# EAGLE board PCB v14 (EAGLE 9.7.0)
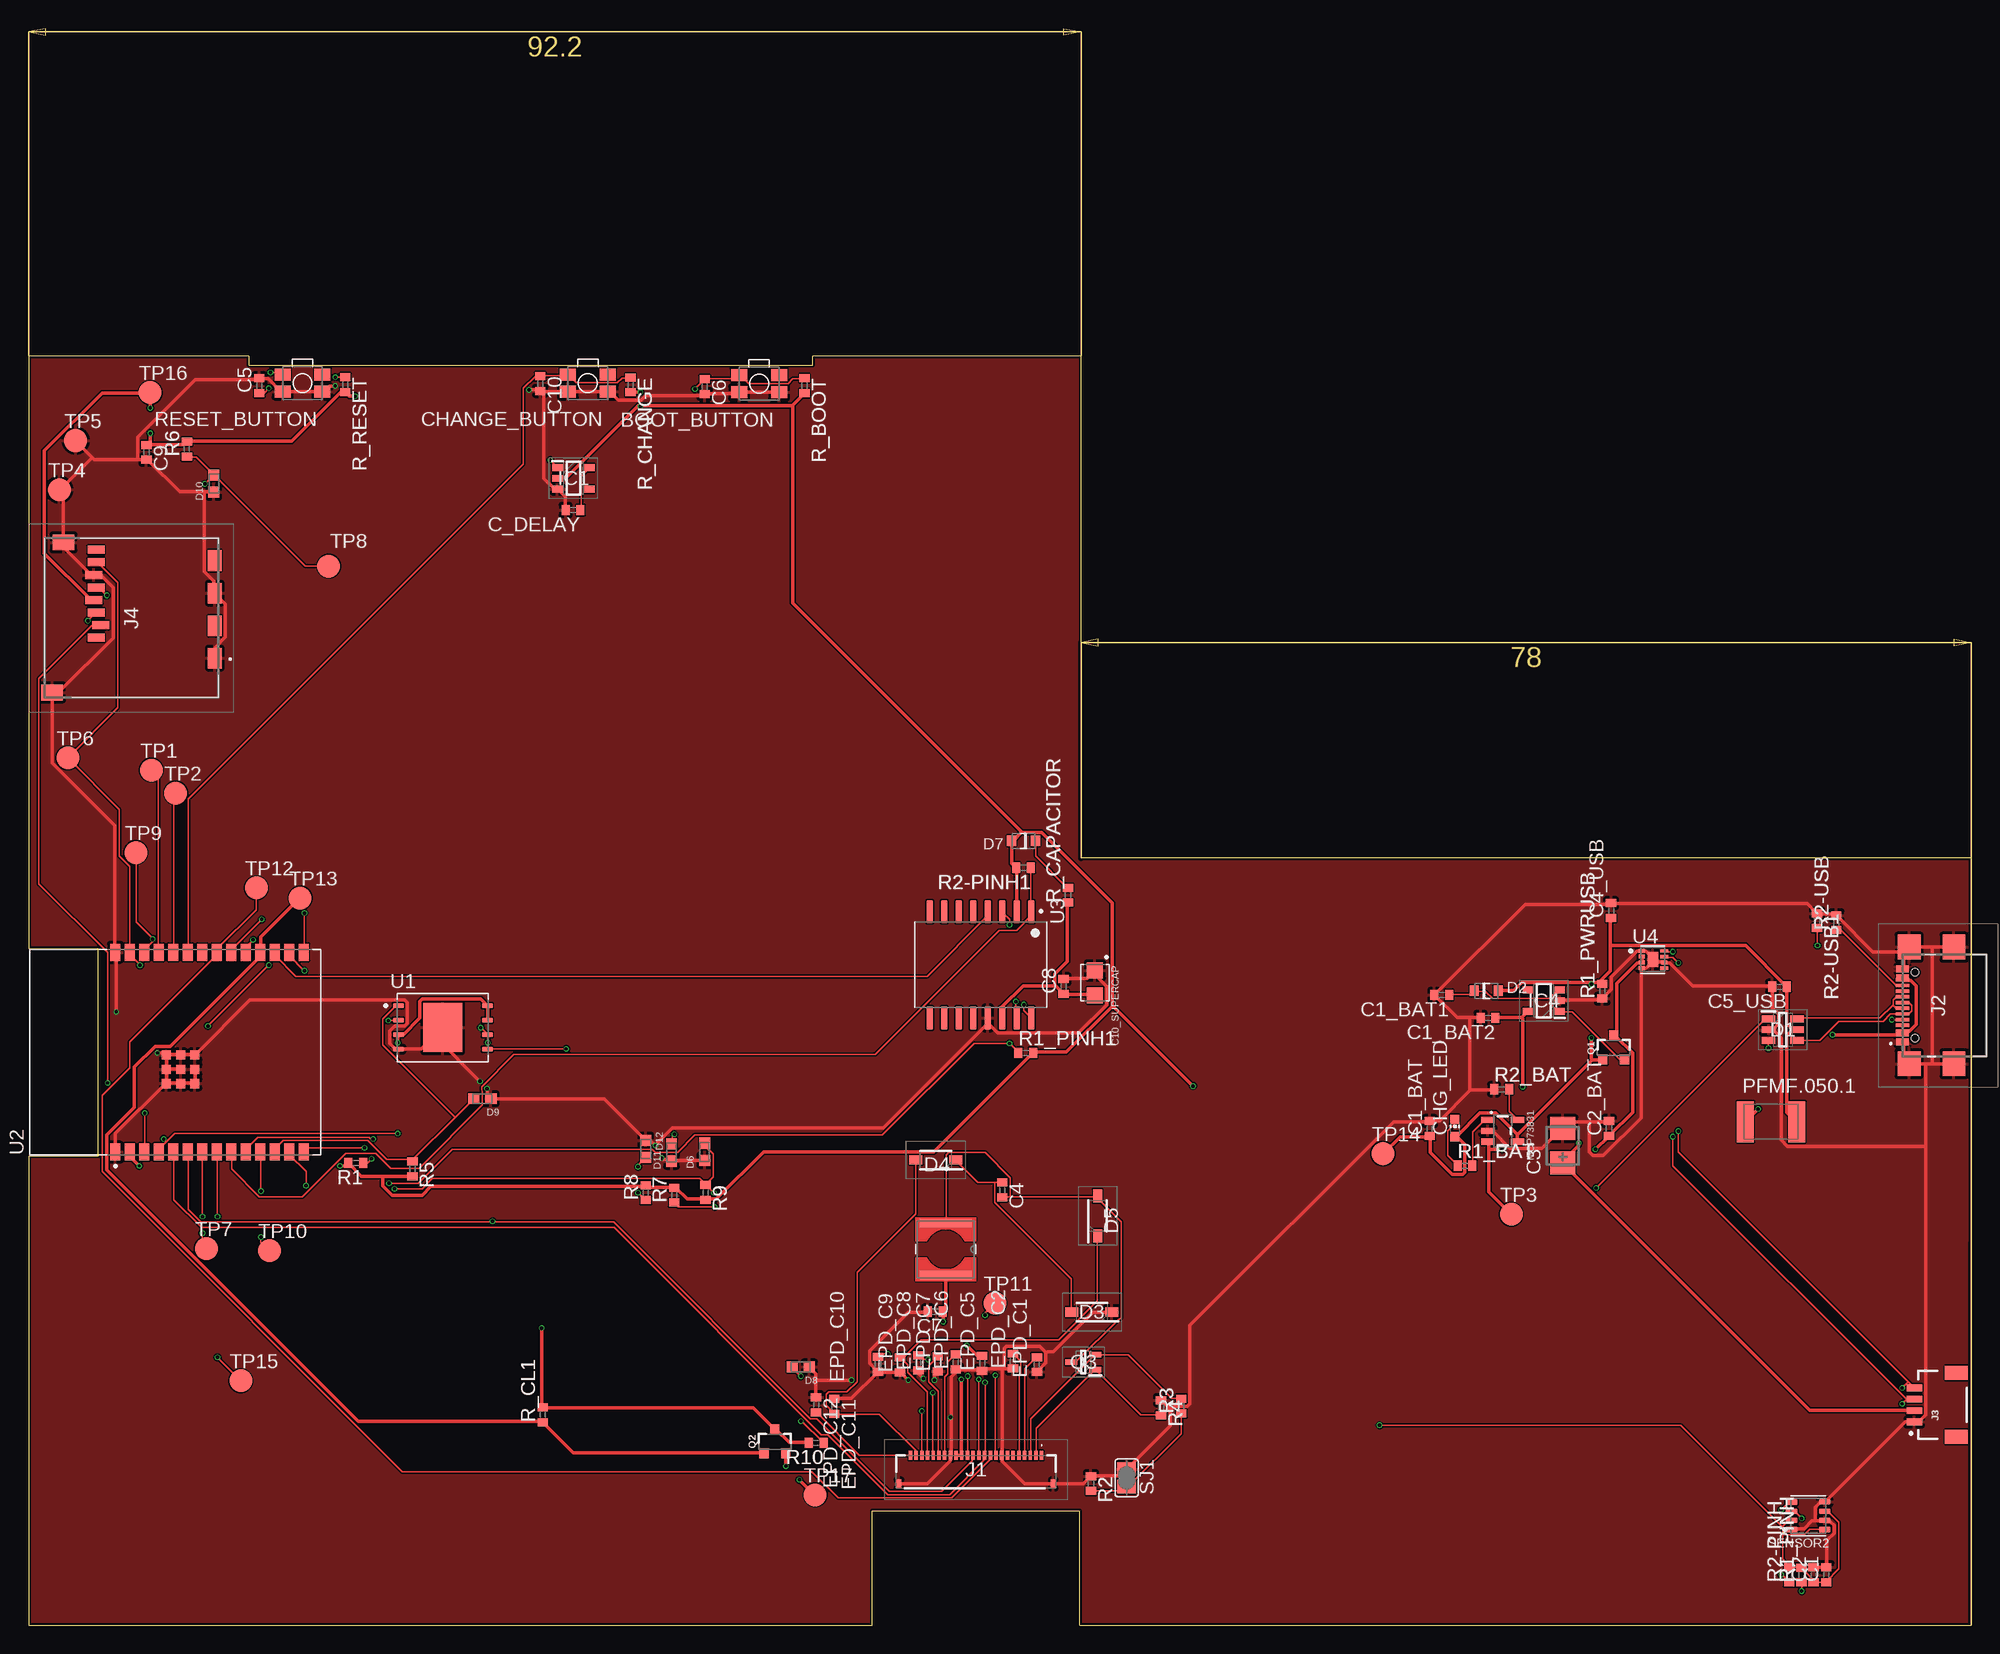
[diagram p0: board, top side]
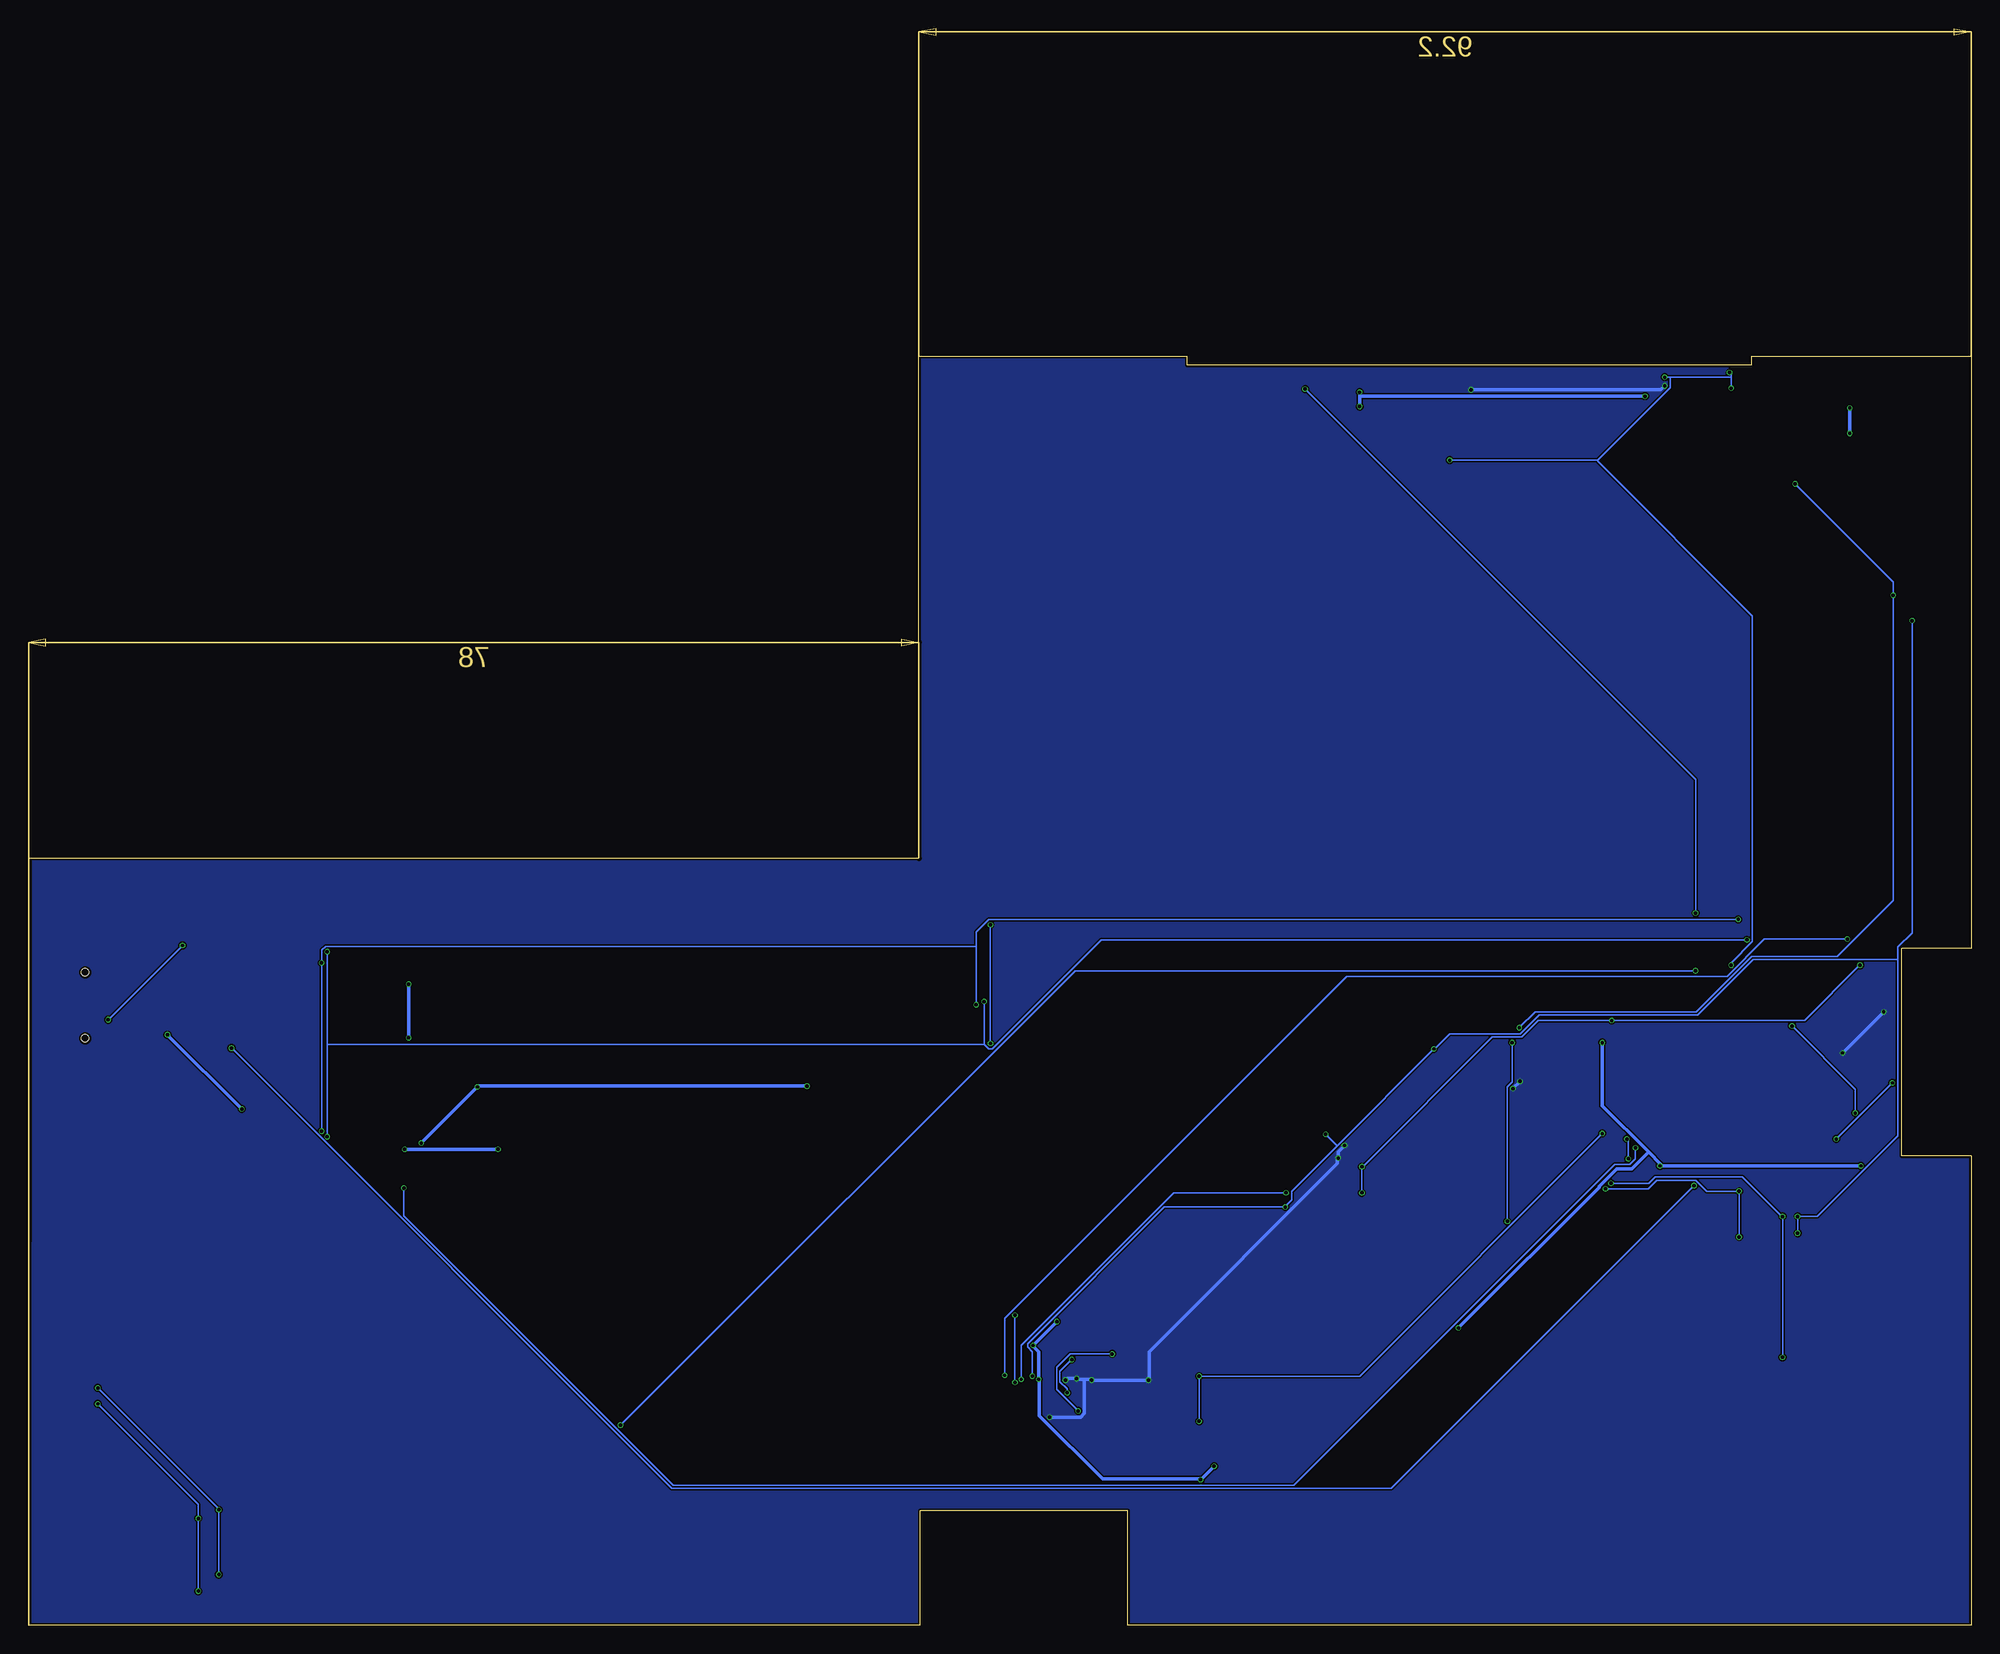
[diagram p1: board, bottom side, seen from below]

Size 170.2 x 111.2 mm. Coordinates in mm from the lower left corner, seen from the top.
Outline: 0,0 73.9,0 73.9,10 92.1,10 92.1,0 170.2,0 170.2,67.2 92.2,67.2 92.2,111.2 68.7,111.2 68.7,110.4 19.3,110.4 19.3,111.2 0,111.2 0,59.3 6.1,59.3 6.1,41.1 0,41.1 0,0
Copper layers (1*16): Top 0.035mm / dielectric 1.6mm / Bottom 0.035mm
Design rules "jlcpcb-2layers.dru": minimum track width 0.15mm, minimum drill 0.3mm, track to track 5mil, track to pad 5mil, pad to pad 5mil, via to via 5mil, smd to smd 5mil, copper to edge 0.2mm, drill to drill 6mil, minimum pad ring 10mil, minimum via ring 3mil, stop-mask expansion 4mil, vias tented up to drill 0mil, thermal gap 10mil
Net classes: 1 POWER: width 0.3 mm

## Footprints (pad centres in the part's own frame; a part is rotated, then mirrored left to right if it is on the bottom)
MYBUTTON = smd 1.4 x 1.05: 1 1.75,0.75; 2 -1.75,0.75; 3 -1.75,-0.75; 4 1.75,-0.75
EAGLE-LTSPICE_C0402 = smd 0.7 x 0.9: 1 -0.65,0; 2 0.65,0
RCL_CT3528 = smd 2 x 2.2: + -1.5,0; - 1.5,0
CAPCP3225X100N = smd 1.4 x 1.4: 1 -1.1,0; 2 1.1,0
ADAFRUIT_CHIP-LED0603 = smd 0.8 x 0.8: A 0,-0.75; C 0,0.75
SOT95P280X145-6N = smd 1.2 x 0.6: 1 -1.25,0.95; 2 -1.25,0; 3 -1.25,-0.95; 4 1.25,-0.95; 5 1.25,0; 6 1.25,0.95
ESP32_WROVER_AVX---SD0805S020S1R0_AVX_SD0805S020S1R0_0 = smd 0.8 x 0.9: 1 -1.05,0; 2 1.05,0
SOD3716X135N = smd 1.15 x 0.8: 1 -1.75,0; 2 1.75,0
DIOC1608X36N = smd 0.97 x 0.94: 1 -0.75,0; 2 0.75,0
SOT95P280X125-5N = smd 0.9 x 0.6: 1 -1.4,0.95; 2 -1.4,0; 3 -1.4,-0.95; 4 1.4,-0.95; 5 1.4,0.95
SOT95P280X120-5N = smd 0.9 x 0.6: 1 -1.4,0.95; 2 -1.4,0; 3 -1.4,-0.95; 4 1.4,-0.95; 5 1.4,0.95
FH34SRJ24S05SH99 = smd 0.3 x 0.8: 1 5.75,1.45; 2 5.25,1.45; 3 4.75,1.45; 4 4.25,1.45; 5 3.75,1.45; 6 3.25,1.45; 7 2.75,1.45; 8 2.25,1.45; 9 1.75,1.45; 10 1.25,1.45; 11 0.75,1.45; 12 0.25,1.45; 13 -0.25,1.45; 14 -0.75,1.45; 15 -1.25,1.45; 16 -1.75,1.45; 17 -2.25,1.45; 18 -2.75,1.45; 19 -3.25,1.45; 20 -3.75,1.45; 21 -4.25,1.45; 22 -4.75,1.45; 23 -5.25,1.45; 24 -5.75,1.45 | smd 0.4 x 0.8: MP1 6.75,-1.05; MP2 -6.75,-1.05
SAMACSYS_PARTS_USB4110GFA = smd 0.3 x 1.074: A1 -3.35,3.678; A4 -2.55,3.678; A9 2.55,3.678; A12 3.35,3.678; B1 3.05,3.678; B12 -3.05,3.678 | smd 0.3 x 1.15: A5 -1.25,3.678; A6 -0.25,3.678; A7 0.25,3.678; A8 1.25,3.678; B4 2.25,3.678; B5 1.75,3.678; B6 0.75,3.678; B7 -0.75,3.678; B8 -1.75,3.678; B9 -2.25,3.678 | smd 2.18 x 2: MP1 -5.11,-0.827; MP2 5.11,-0.827; MP3 -5.11,3.103; MP4 5.11,3.103 | hole 0.65: -2.89,2.603; 2.89,2.603
JST04_1MM_RA = smd 0.6 x 1.35: 1 -1.5,0; 2 -0.5,0; 3 0.5,0; 4 1.5,0 | smd 1.2 x 2: NC1 2.8,-3.675; NC2 -2.8,-3.675
112ATAARR03ATTEND = smd 1.8 x 1.2: G1 10.6,10.4; G2 4.9,10.4; S1 7.75,10.4; S2 2.05,10.4 | smd 1.4 x 1.9: G3 13.6,-3.85; G4 0.45,-2.85 | smd 0.7 x 1.5: P1 8.8,0; P2 7.7,0.4; P3 6.6,0; P4 5.5,-0.2; P5 4.4,0; P6 3.3,-0.2; P7 2.2,0; P8 1.1,0
IND_4828-WE-TPC_WRE = smd 0.762 x 4.572: 1 -2.286,0; 2 2.286,0
ESP32_WROVER_SPARKFUN-IC-POWER_SOT23-5 = smd 0.55 x 1.2: 1 -0.95,-1.3; 2 0,-1.3; 3 0.95,-1.3; 4 0.95,1.3; 5 -0.95,1.3
ESP32C6_VARISTOR_CT/CN1812 = smd 1.5 x 3.6: 1 -2.25,0; 2 2.25,0
ESP32_WROVER_SPARKFUN-DISCRETESEMI_SOT23-3 = smd 0.8 x 0.9: 1 -0.95,-1; 2 0.95,-1; 3 0,1.1
SOT65P210X110-3N = smd 1.05 x 0.5: 1 -1.05,0.65; 2 -1.05,-0.65; 3 1.05,0
ESP32_WROVER_EAGLE-LTSPICE_R0402 = smd 0.7 x 0.9: 1 -0.65,0; 2 0.65,0
ESP32_WROVER_BME680_PSON80P300X300X100-8N = smd 1.016 x 0.5: 1 1.458,1.2; 2 1.458,0.4; 3 1.458,-0.4; 4 1.458,-1.2; 5 -1.458,-1.22; 6 -1.458,-0.4; 7 -1.458,0.4; 8 -1.458,1.2
SJ = smd 1.168 x 1.6: 1 -0.762,0; 2 0.762,0
TP20R = smd 2 x 2: TP 0,0
SON127P600X800X80-9N = smd 0.94 x 0.44: 1 -3.895,1.905; 2 -3.895,0.635; 3 -3.895,-0.635; 4 -3.895,-1.905; 5 3.895,-1.905; 6 3.895,-0.635; 7 3.895,0.635; 8 3.895,1.905 | smd 3.4 x 4.3: 9 0,0
XCVR_ESP32-C6-WROOM-1-N8 = smd 1.5 x 0.9: 1 -8.75,5.26; 2 -8.75,3.99; 3 -8.75,2.72; 4 -8.75,1.45; 5 -8.75,0.18; 6 -8.75,-1.09; 7 -8.75,-2.36; 8 -8.75,-3.63; 9 -8.75,-4.9; 10 -8.75,-6.17; 11 -8.75,-7.44; 12 -8.75,-8.71; 13 -8.75,-9.98; 14 -8.75,-11.25; 15 8.75,-11.25; 16 8.75,-9.98; 17 8.75,-8.71; 18 8.75,-7.44; 19 8.75,-6.17; 20 8.75,-4.9; 21 8.75,-3.63; 22 8.75,-2.36; 23 8.75,-1.09; 24 8.75,0.18; 25 8.75,1.45; 26 8.75,2.72; 27 8.75,3.99; 28 8.75,5.26 | smd 0.8 x 0.8: 29_1 -2.755,0.79; 29_2 -1.505,0.79; 29_3 -0.255,0.79; 29_4 -2.755,-0.46; 29_5 -1.505,-0.46; 29_6 -0.255,-0.46; 29_7 -2.755,-1.71; 29_8 -1.505,-1.71; 29_9 -0.255,-1.71
SOIC127P1032X265-16N = smd 2.05 x 0.59: 1 -4.655,4.445; 2 -4.655,3.175; 3 -4.655,1.905; 4 -4.655,0.635; 5 -4.655,-0.635; 6 -4.655,-1.905; 7 -4.655,-3.175; 8 -4.655,-4.445; 9 4.655,-4.445; 10 4.655,-3.175; 11 4.655,-1.905; 12 4.655,-0.635; 13 4.655,0.635; 14 4.655,1.905; 15 4.655,3.175; 16 4.655,4.445
SON50P200X200X80-9N = smd 0.608 x 0.346: 1 -0.985,0.75; 2 -0.985,0.25; 3 -0.985,-0.25; 4 -0.985,-0.75; 6 0.985,-0.25 | smd 0.76 x 0.27: 5 0.985,-0.75; 7 0.985,0.25; 8 0.985,0.75 | smd 0.9 x 1.3: 9 0,0

## Placement (x,y rotation side)
BOOT_BUTTON  BUTTON_CUSYOMV1  [MYBUTTON]  64,108.78 180 top
C1  100nF  [EAGLE-LTSPICE_C0402]  157.47,4.42 90 top
C1_BAT  47uF  [EAGLE-LTSPICE_C0402]  122.75,43.51 90 top
C1_BAT1  47uF  [EAGLE-LTSPICE_C0402]  123.79,55.21 180 top
C1_BAT2  47uF  [EAGLE-LTSPICE_C0402]  127.85,53.21 180 top
C2  100nF  [EAGLE-LTSPICE_C0402]  156.37,4.4 90 top
C2_BAT  47uF  [EAGLE-LTSPICE_C0402]  138.45,43.52 90 top
C3  100uF TANT  [RCL_CT3528]  134.4,42.01 90 top
C4  47uF/25V  [EAGLE-LTSPICE_C0402]  85.29,38.13 270 top
C4_USB  100nF  [EAGLE-LTSPICE_C0402]  138.63,62.61 90 top
C5  1uF  [EAGLE-LTSPICE_C0402]  20.21,108.61 90 top
C5_USB  4.7uF  [EAGLE-LTSPICE_C0402]  153.38,55.93 180 top
C6  100nF  [EAGLE-LTSPICE_C0402]  59.23,108.52 270 top
C7  10uF  [EAGLE-LTSPICE_C0402]  79.43,27.47 180 top
C8  100nF  [EAGLE-LTSPICE_C0402]  90.67,55.96 90 top
C9  100nF  [EAGLE-LTSPICE_C0402]  10.33,102.76 270 top
C10  100nF  [EAGLE-LTSPICE_C0402]  44.83,108.78 270 top
C10_SUPERCAP  CPH3225A  [CAPCP3225X100N]  93.42,56.28 270 top
C_DELAY  100nF  [EAGLE-LTSPICE_C0402]  47.69,97.71 180 top
CHANGE_BUTTON  BUTTON_CUSYOMV1  [MYBUTTON]  49,108.84 180 top
CHG_LED  [ADAFRUIT_CHIP-LED0603]  124.94,43.55 0 top
D1  USBLC6-2SC6Y  [SOT95P280X145-6N]  153.68,52.17 0 top
D2  SD0805S020S1R0  [ESP32_WROVER_AVX---SD0805S020S1R0_AVX_SD0805S020S1R0_0]  127.69,55.58 0 top
D3  MBR0530  [SOD3716X135N]  93.15,27.43 180 top
D4  MBR0530  [SOD3716X135N]  79.48,40.75 180 top
D5  MBR0530  [SOD3716X135N]  93.65,35.86 90 top
D6  PGB1010603MR  [DIOC1608X36N]  59.23,41.48 90 top
D7  SD0805S020S1R0  [ESP32_WROVER_AVX---SD0805S020S1R0_AVX_SD0805S020S1R0_0]  87.16,68.72 180 top
D8  PGB1010603MR  [DIOC1608X36N]  67.64,22.63 180 top
D9  PGB1010603MR  [DIOC1608X36N]  39.76,46.13 180 top
D10  PGB1010603MR  [DIOC1608X36N]  16.23,100.02 90 top
D11  PGB1010603MR  [DIOC1608X36N]  56.33,41.4 90 top
D12  PGB1010603MR  [DIOC1608X36N]  54.07,41.72 270 top
EPD_C1  1uF/50V  [EAGLE-LTSPICE_C0402]  88.33,22.83 90 top
EPD_C2  1uF/50V  [EAGLE-LTSPICE_C0402]  86.23,23.14 90 top
EPD_C5  1uF/50V  [EAGLE-LTSPICE_C0402]  83.53,22.95 90 top
EPD_C6  1uF/50V  [EAGLE-LTSPICE_C0402]  81.23,23.06 90 top
EPD_C7  1uF/50V  [EAGLE-LTSPICE_C0402]  79.65,22.88 90 top
EPD_C8  1uF/50V  [EAGLE-LTSPICE_C0402]  77.95,22.99 90 top
EPD_C9  1uF/50V  [EAGLE-LTSPICE_C0402]  76.35,22.8 90 top
EPD_C10  1uF/50V  [EAGLE-LTSPICE_C0402]  74.41,22.85 90 top
EPD_C11  1uF/50V  [EAGLE-LTSPICE_C0402]  70.59,19.17 270 top
EPD_C12  1uF/50V  [EAGLE-LTSPICE_C0402]  68.99,19.31 270 top
IC1  BD5229G-TR  [SOT95P280X125-5N]  47.73,100.49 0 top
IC4  XC6220A331MR-G  [SOT95P280X120-5N]  132.73,54.71 180 top
J1  FH34SRJ-24S-0.5SH_99_  [FH34SRJ24S05SH99]  83,13.42 0 top
J2  SAMACSYS_PARTS_USB4110-GF-A  [SAMACSYS_PARTS_USB4110GFA]  167.84,54.3 90 top
J3  QWIIC_RIGHT_ANGLE  [JST04_1MM_RA]  165.2,19.3 90 top
J4  112A-TAAR-R03_ATTEND  [112ATAARR03ATTEND]  5.92,95.33 270 top
L1  68uH  [IND_4828-WE-TPC_WRE]  80.35,32.93 270 top
MCP73831  ESP32_WROVER_SPARKFUN-IC-POWER_MCP73831  [ESP32_WROVER_SPARKFUN-IC-POWER_SOT23-5]  129.14,43.31 270 top
PFMF.050.1  ESP32C6_VARISTORCN1812  [ESP32C6_VARISTOR_CT/CN1812]  152.64,44.1 0 top
Q1  20V/4.2A/52mΩ/1.4W  [ESP32_WROVER_SPARKFUN-DISCRETESEMI_SOT23-3]  138.86,50.56 0 top
Q2  20V/4.2A/52mΩ/1.4W  [ESP32_WROVER_SPARKFUN-DISCRETESEMI_SOT23-3]  65.38,16.06 0 top
Q3  SI1308EDL-T1-GE3  [SOT65P210X110-3N]  92.41,23.05 180 top
R1  10k  [ESP32_WROVER_EAGLE-LTSPICE_R0402]  28.67,40.49 180 top
R1_BAT  200  [ESP32_WROVER_EAGLE-LTSPICE_R0402]  125.83,40.25 0 top
R1_PINH  10K  [ESP32_WROVER_EAGLE-LTSPICE_R0402]  155.31,4.39 90 top
R1_PINH1  10k  [ESP32_WROVER_EAGLE-LTSPICE_R0402]  87.36,50.14 0 top
R1_PWRUSB  100k  [ESP32_WROVER_EAGLE-LTSPICE_R0402]  137.86,55.55 90 top
R2  [ESP32_WROVER_EAGLE-LTSPICE_R0402]  93.07,12.4 270 top
R2-PINH  10K  [ESP32_WROVER_EAGLE-LTSPICE_R0402]  154.23,4.4 90 top
R2-PINH1  10k  [ESP32_WROVER_EAGLE-LTSPICE_R0402]  87.16,66.36 180 top
R2-USB  5k1  [ESP32_WROVER_EAGLE-LTSPICE_R0402]  158.35,61.55 90 top
R2-USB1  5k1  [ESP32_WROVER_EAGLE-LTSPICE_R0402]  156.67,61.72 270 top
R2_BAT  2K  [ESP32_WROVER_EAGLE-LTSPICE_R0402]  129.04,46.95 0 top
R3  0.47  [ESP32_WROVER_EAGLE-LTSPICE_R0402]  100.97,19.19 90 top
R4  10k  [ESP32_WROVER_EAGLE-LTSPICE_R0402]  99.21,19.05 270 top
R5  10K  [ESP32_WROVER_EAGLE-LTSPICE_R0402]  33.63,39.97 270 top
R6  10K  [ESP32_WROVER_EAGLE-LTSPICE_R0402]  13.87,103.05 90 top
R7  10K  [ESP32_WROVER_EAGLE-LTSPICE_R0402]  56.57,37.67 90 top
R8  10K  [ESP32_WROVER_EAGLE-LTSPICE_R0402]  54.07,37.89 90 top
R9  10K  [ESP32_WROVER_EAGLE-LTSPICE_R0402]  59.31,37.91 270 top
R10  10K  [ESP32_WROVER_EAGLE-LTSPICE_R0402]  68.99,15.97 180 top
R_BOOT  10k  [ESP32_WROVER_EAGLE-LTSPICE_R0402]  67.97,108.61 270 top
R_CAPACITOR  15  [ESP32_WROVER_EAGLE-LTSPICE_R0402]  91.06,63.95 90 top
R_CHANGE  10K  [ESP32_WROVER_EAGLE-LTSPICE_R0402]  52.74,108.68 270 top
R_CL1  10K  [ESP32_WROVER_EAGLE-LTSPICE_R0402]  45.05,18.43 90 top
R_RESET  10k  [ESP32_WROVER_EAGLE-LTSPICE_R0402]  27.74,108.7 270 top
RESET_BUTTON  BUTTON_CUSYOMV1  [MYBUTTON]  24,108.84 180 top
SENSOR2  BME688  [ESP32_WROVER_BME680_PSON80P300X300X100-8N]  155.89,9.58 180 top
SJ1  [SJ]  96.19,12.9 270 top
TP1  TPTP20R  [TP20R]  10.77,74.91 0 top
TP2  TPTP20R  [TP20R]  12.89,72.91 0 top
TP3  TPTP20R  [TP20R]  129.89,35.99 0 top
TP4  TPTP20R  [TP20R]  2.71,99.49 0 top
TP5  TPTP20R  [TP20R]  4.13,103.79 0 top
TP6  TPTP20R  [TP20R]  3.45,75.99 0 top
TP7  TPTP20R  [TP20R]  15.57,32.99 0 top
TP8  TPTP20R  [TP20R]  26.29,92.79 0 top
TP9  TPTP20R  [TP20R]  9.41,67.69 0 top
TP10  TPTP20R  [TP20R]  21.1,32.81 0 top
TP11  TPTP20R  [TP20R]  84.65,28.21 0 top
TP12  TPTP20R  [TP20R]  19.95,64.61 0 top
TP13  TPTP20R  [TP20R]  23.8,63.71 0 top
TP14  TPTP20R  [TP20R]  118.65,41.31 0 top
TP15  TPTP20R  [TP20R]  18.6,21.41 0 top
TP16  TPTP20R  [TP20R]  10.65,108.01 0 top
TP17  TPTP20R  [TP20R]  68.9,11.41 0 top
U1  W25Q512JVEIQ  [SON127P600X800X80-9N]  36.29,52.36 0 top
U2  ESP32-C6-WROOM-1-N8  [XCVR_ESP32-C6-WROOM-1-N8]  12.86,50.2 90 top
U3  DS3231SN#  [SOIC127P1032X265-16N]  83.4,57.85 270 top
U4  MAX17048G+T10  [SON50P200X200X80-9N]  142.3,58.32 0 top

## Library data of the parts
BOOT_BUTTON CHANGE_BUTTON CHG_LED J2 PFMF.050.1 RESET_BUTTON SJ1 TP1-TP17 = DeskAssistant v19 v1
C1 C1_BAT C1_BAT1 C1_BAT2 C2 C2_BAT C4 C4_USB C5 C5_USB C6-C10 C_DELAY EPD_C1 EPD_C2 EPD_C5-EPD_C12 = DeskAssistant v19 v1; SPICEMODEL: NONE; SPICEPREFIX: C
C3 = DeskAssistant v19 v1; SPICEPREFIX: C
C10_SUPERCAP = DeskAssistant v19 v1; AVAILABILITY: Not in stock; CHECK_PRICES: https://www.snapeda.com/parts/CPH3225A/Seiko+Instruments/view-part/?ref=eda; DESCRIPTION: 11 mF (EDLC) Supercapacitor 3.3 V 1210 (3225 Metric) - -; MF: Seiko Instruments; MP: CPH3225A; PACKAGE: 1210 Seiko; PRICE: None; PURCHASE-URL: https://www.snapeda.com/api/url_track_click_mouser/?unipart_id=562593&manufacturer=Seiko Instruments&part_name=CPH3225A&search_term=None; SNAPEDA_LINK: https://www.snapeda.com/parts/CPH3225A/Seiko+Instruments/view-part/?ref=snap
D1 = DeskAssistant v19 v1; AVAILABILITY: In Stock; CHECK_PRICES: https://www.snapeda.com/parts/USBLC6-2SC6Y/STMicroelectronics/view-part/?ref=eda; DESCRIPTION: 17V Clamp 5A (8/20µs) Ipp Tvs Diode Surface Mount SOT-23-6; MF: STMicroelectronics; MP: USBLC6-2SC6Y; PACKAGE: SOT-23-6 STMicroelectronics; PRICE: None; SNAPEDA_LINK: https://www.snapeda.com/parts/USBLC6-2SC6Y/STMicroelectronics/view-part/?ref=snap
D2 D7 = DeskAssistant v19 v1; CENTROID_NOT_SPECIFIED: No; DATASHEET: http://datasheets.avx.com/schottky.pdf; DIGIKEY_DESCRIPTION: DIODE SCHOTTKY 20V 1A 0805; DIGIKEY_PART_NUMBER: 478-7800-1-ND; LEAD_FREE: yes; MF: AVX; MOUSER_PART_NUMBER: 581-SD0805S020S1R0; PACKAGE: 0805 (2012 metric); PREFIX: D; ROHS: yes; TEMPERATURE_RANGE_HIGH: +125°C; TEMPERATURE_RANGE_LOW: -55°C
D3-D5 = DeskAssistant v19 v1; AVAILABILITY: In Stock; CHECK_PRICES: https://www.snapeda.com/parts/MBR0530/Onsemi/view-part/?ref=eda; DESCRIPTION: Diode Schottky 30 V 500mA Surface Mount SOD-123; MF: ON Semiconductor; MP: MBR0530; PACKAGE: SOD-123-2 ON Semiconductor; PRICE: None; PURCHASE-URL: https://www.snapeda.com/api/url_track_click_mouser/?unipart_id=179458&manufacturer=ON Semiconductor&part_name=MBR0530&search_term=None; SNAPEDA_LINK: https://www.snapeda.com/parts/MBR0530/Onsemi/view-part/?ref=snap
D6 D8-D12 = DeskAssistant v19 v1; AVAILABILITY: In Stock; CHECK_PRICES: https://www.snapeda.com/parts/PGB1010603MR/Littelfuse/view-part/?ref=eda; DESCRIPTION: 150V (Typ) Clamp - Ipp Tvs Diode Surface Mount 0603 (1608 Metric); MF: Littelfuse Inc.; MP: PGB1010603MR; PACKAGE: 0603 Littelfuse Inc.; PRICE: None; PURCHASE-URL: https://www.snapeda.com/api/url_track_click_mouser/?unipart_id=5659453&manufacturer=Littelfuse Inc.&part_name=PGB1010603MR&search_term=None; SNAPEDA_LINK: https://www.snapeda.com/parts/PGB1010603MR/Littelfuse/view-part/?ref=snap
IC1 = DeskAssistant v19 v1; DESCRIPTION: Voltage Detector with Adjustable Delay Time: CMOS processes are utilized to develop high precision, low current consumption CMOS reset ICs that allow arbitrary setting of the delay time. The extensive lineup includes both Nch Open Drain and CMOS output types in a wide range of detection voltages (from 2.3V to 6.0V, in 0.1V steps), enabling selection of the ideal solution based on customer requirements. In addition, the entire series is of course both lead-free and RoHS-compliant.; HEIGHT: 1.25mm; MANUFACTURER_NAME: ROHM Semiconductor; MANUFACTURER_PART_NUMBER: BD5229G-TR; MOUSER_PART_NUMBER: 755-BD5229G-TR; MOUSER_PRICE-STOCK: https://www.mouser.co.uk/ProductDetail/ROHM-Semiconductor/BD5229G-TR?qs=4kLU8WoGk0vvnhrrYwdszw%3D%3D
IC4 = DeskAssistant v19 v1; DESCRIPTION: LDO Voltage Regulators; HEIGHT: 1.2mm; MANUFACTURER_NAME: Torex; MANUFACTURER_PART_NUMBER: XC6220A331MR-G; MOUSER_PART_NUMBER: 865-XC6220A331MR-G; MOUSER_PRICE-STOCK: https://www.mouser.co.uk/ProductDetail/Torex-Semiconductor/XC6220A331MR-G?qs=AsjdqWjXhJ8ZSWznL1J0gg%3D%3D
J1 = DeskAssistant v19 v1; DESCRIPTION: 24 Position FFC, FPC Connector Contacts, Top and Bottom 0.020" (0.50mm) Surface Mount, Right Angle; HEIGHT: 1.1mm; MANUFACTURER_NAME: Hirose; MANUFACTURER_PART_NUMBER: FH34SRJ-24S-0.5SH(99); MOUSER_PART_NUMBER: 798-FH34SRJ24S05SH99; MOUSER_PRICE-STOCK: https://www.mouser.co.uk/ProductDetail/Hirose-Connector/FH34SRJ-24S-0.5SH99?qs=vcbW%252B4%252BSTIpKBl5ap9J8Fw%3D%3D
J3 = DeskAssistant v19 v1; PROD_ID: CONN-13694
J4 = DeskAssistant v19 v1; DESCRIPTION: Micro SD Card Socket, Push-Push Type, Top Mount, SMT, H=1.83mm, 10u; HEIGHT: 1.9mm; MANUFACTURER_NAME: ATTEND; MANUFACTURER_PART_NUMBER: 112A-TAAR-R03 ATTEND
L1 = DeskAssistant v19 v1; COPYRIGHT: Copyright (C) 2024 Ultra Librarian. All rights reserved.; MANUFACTURER_PART_NUMBER: 744043680; MFR_NAME: Wurth Electronics
MCP73831 = DeskAssistant v19 v1; PROD_ID: IC-09995
Q1 Q2 = DeskAssistant v19 v1; PROD_ID: TRAN-14388
Q3 = DeskAssistant v19 v1; AVAILABILITY: In Stock; CHECK_PRICES: https://www.snapeda.com/parts/SI1308EDL-T1-GE3/Vishay+Siliconix/view-part/?ref=eda; DESCRIPTION: Si1308EDL-T1-GE3 N-channel MOSFET Transistor, 1.5 A, 30 V, 3-Pin SC-70 | Siliconix / Vishay SI1308EDL-T1-GE3; MF: Vishay Siliconix; MP: SI1308EDL-T1-GE3; PACKAGE: SOT-323 Vishay Semiconductor; PRICE: None; PURCHASE-URL: https://www.snapeda.com/api/url_track_click_mouser/?unipart_id=274603&manufacturer=Vishay Siliconix&part_name=SI1308EDL-T1-GE3&search_term=None; SNAPEDA_LINK: https://www.snapeda.com/parts/SI1308EDL-T1-GE3/Vishay+Siliconix/view-part/?ref=snap
R1 R1_BAT R1_PINH R1_PINH1 R1_PWRUSB R2 R2-PINH R2-PINH1 R2-USB R2-USB1 R2_BAT R3-R10 R_BOOT R_CAPACITOR R_CHANGE R_CL1 R_RESET = DeskAssistant v19 v1; SPICEMODEL: NONE; SPICEPREFIX: R
SENSOR2 = DeskAssistant v19 v1; AVAILABILITY: Unavailable; DESCRIPTION: Integrated Environmental Unit; MF: Bosch Sensortec; MP: BME680; PACKAGE: LGA-8 Bosch Tools; PRICE: None
U1 = DeskAssistant v19 v1; AVAILABILITY: In Stock; CHECK_PRICES: https://www.snapeda.com/parts/W25Q512JVEIQ/Winbond+Electronics/view-part/?ref=eda; DESCRIPTION: FLASH - NOR Memory IC 512Mb (64M x 8) SPI - Quad I/O 133 MHz 8-WSON (8x6); MF: Winbond Electronics; MP: W25Q512JVEIQ; PACKAGE: Package; PRICE: None; SNAPEDA_LINK: https://www.snapeda.com/parts/W25Q512JVEIQ/Winbond+Electronics/view-part/?ref=snap
U2 = DeskAssistant v19 v1; AVAILABILITY: In Stock; CHECK_PRICES: https://www.snapeda.com/parts/ESP32-C6-WROOM-1-N8/Espressif+Systems/view-part/?ref=eda; DESCRIPTION: Multiprotocol Modules ESP32-C6 module, Wi-Fi 6 in 2.4 GHz band, Bluetooth 5, Zigbee 3.0 and Thread. ESP34-WROOM Compatible - ENGINEERING SAMPLE; MF: Espressif Systems; MP: ESP32-C6-WROOM-1-N8; PACKAGE: None; PRICE: None; SNAPEDA_LINK: https://www.snapeda.com/parts/ESP32-C6-WROOM-1-N8/Espressif+Systems/view-part/?ref=snap
U3 = DeskAssistant v19 v1; AVAILABILITY: In Stock; CHECK_PRICES: https://www.snapeda.com/parts/DS3231SN%23/Analog+Devices/view-part/?ref=eda; DESCRIPTION: Extremely Accurate I²C-Integrated RTC/TCXO/Crystal; MF: Analog Devices; MP: DS3231SN#; PACKAGE: SOIC-16 Maxim; PRICE: None; PURCHASE-URL: https://www.snapeda.com/api/url_track_click_mouser/?unipart_id=99048&manufacturer=Analog Devices&part_name=DS3231SN#&search_term=None; SNAPEDA_LINK: https://www.snapeda.com/parts/DS3231SN%23/Analog+Devices/view-part/?ref=snap
U4 = DeskAssistant v19 v1; AVAILABILITY: In Stock; CHECK_PRICES: https://www.snapeda.com/parts/MAX17048G+T10/Analog+Devices/view-part/?ref=eda; DESCRIPTION: 3µA 1-Cell/2-Cell Fuel Gauge with ModelGauge; MF: Analog Devices; MP: MAX17048G+T10; PACKAGE: TDFN-8 Maxim; PRICE: None; PURCHASE-URL: https://www.snapeda.com/api/url_track_click_mouser/?unipart_id=329239&manufacturer=Analog Devices&part_name=MAX17048G+T10&search_term=None; SNAPEDA_LINK: https://www.snapeda.com/parts/MAX17048G+T10/Analog+Devices/view-part/?ref=snap

## Nets
3V3 [POWER]: C1_BAT2.1 C3.+ C9.1 D7.2 IC1.2 IC4.5 J3.2 J4.P4 Q2.3 R1.2 R1_PINH1.2 R2-PINH1.2 R5.2 R6.2 R7.2 R8.2 R9.2 R10.2 R_BOOT.2 R_CHANGE.2 R_CL1.2 R_RESET.2 TP16.TP U1.3 U1.7 U1.8 U2.2 U3.2
12C_PW: C1.1 C2.1 R1_PINH.2 R2-PINH.2 SENSOR2.2 SENSOR2.6 SENSOR2.8 U2.16
32KHZ: R2-PINH1.1 U2.9 U3.1
DN: D1.4 J2.A7 J2.B7
DP: D1.6 J2.A6 J2.B6
EPD_3V3 [POWER]: C7.1 EPD_C5.2 J1.15 J1.16 L1.2 Q2.2 TP17.TP
EPD_3V3_C [POWER]: Q2.1 R_CL1.1 TP13.TP U2.18
EPD_BUSY: J1.9 TP9.TP U2.26
EPD_CS: D6.2 J1.12 R9.1 TP10.TP U2.11
EPD_DC: J1.11 TP11.TP U2.5
EPD_RST: J1.10 TP12.TP U2.21
FLASH_CS: D9.2 R5.1 U1.1 U2.12
GDR: J1.2 Q3.1 R4.2
GND [POWER]: BOOT_BUTTON.1 BOOT_BUTTON.2 C1.2 C1_BAT1.2 C1_BAT2.2 C1_BAT.2 C2.2 C2_BAT.2 C3.- C4_USB.2 C5.2 C5_USB.2 C6.2 C7.2 C8.2 C9.2 C10.2 C10_SUPERCAP.1 C_DELAY.2 CHANGE_BUTTON.1 CHANGE_BUTTON.2 D1.2 D3.1 D6.1 D8.1 D9.1 D10.1 D11.1 D12.1 EPD_C1.1 EPD_C2.1 EPD_C5.1 EPD_C6.1 EPD_C7.1 EPD_C8.1 EPD_C9.1 EPD_C10.1 EPD_C11.1 EPD_C12.1 IC1.3 IC4.2 J1.8 J1.17 J1.MP1 J1.MP2 J2.A1 J2.A12 J2.B1 J2.B12 J2.MP1 J2.MP2 J2.MP3 J2.MP4 J3.1 J4.G1 J4.G2 J4.G3 J4.G4 J4.P6 MCP73831.2 R1_PWRUSB.1 R2-USB1.1 R2-USB.2 R2.1 R2_BAT.1 R4.1 RESET_BUTTON.1 RESET_BUTTON.2 SENSOR2.1 SENSOR2.5 SENSOR2.7 SJ1.1 TP4.TP TP5.TP U1.4 U1.9 U2.1 U2.28 U2.29_1 U2.29_2 U2.29_3 U2.29_4 U2.29_5 U2.29_6 U2.29_7 U2.29_8 U2.29_9 U3.13 U4.1 U4.4 U4.6 U4.9
INT_RTC: R1_PINH1.1 TP15.TP U2.8 U3.3
IO/BOOT: BOOT_BUTTON.4 C6.1 R_BOOT.1 U2.15
IO/CHANGE: C10.1 CHANGE_BUTTON.4 R_CHANGE.1 U2.23
MISO: D12.2 J4.P7 R8.1 TP6.TP U1.2 U2.27
MOSI: D11.2 J1.14 J4.P3 R7.1 TP7.TP U1.5 U2.7
N$1: J2.A5 R2-USB1.2
N$2: J2.B5 R2-USB.1
N$3: C1_BAT1.1 D2.1 IC4.1 IC4.3 Q1.2
N$4: C4.1 D3.2 D4.1
N$7: C_DELAY.1 IC1.5
N$8: CHG_LED.C R1_BAT.1
N$9: MCP73831.1 R1_BAT.2
N$10: MCP73831.5 R2_BAT.2
N$11: EPD_C12.2 J1.24
N$13: EPD_C10.2 J1.22
N$15: EPD_C7.2 J1.19
N$16: EPD_C8.2 J1.20
N$17: D7.1 R_CAPACITOR.2
N$18: EPD_C6.2 J1.18
N$19: R1.1 U2.10
N$20: EPD_C2.2 J1.5
N$22: EPD_C1.2 J1.4
PREVGH: D5.1 EPD_C9.2 J1.21
PREVGL: D4.2 EPD_C11.2 J1.23
RESE: J1.3 Q3.2 R3.2
RESE': R2.2 R3.1 SJ1.2
RESET: C5.1 IC1.1 R_RESET.1 RESET_BUTTON.4 U2.3
RTC_RST: U2.17 U3.4
RX: TP2.TP U2.24
SCK: D10.2 J1.13 J4.P5 R6.1 TP8.TP U1.6 U2.6
SCL: J3.4 R2-PINH.1 SENSOR2.4 U2.20 U3.16 U4.7
SDA: J3.3 R1_PINH.1 SENSOR2.3 U2.19 U3.15 U4.8
SRC: C4.2 D5.2 L1.1 Q3.3
SS_SD: D8.2 J4.P2 R10.1 U2.4
TX: TP1.TP U2.25
USB_D+: D1.1 U2.14
USB_D-: D1.3 U2.13
VBAT [POWER]: C2_BAT.1 MCP73831.3 Q1.3 TP3.TP U4.2 U4.3
VBUS [POWER]: C1_BAT.1 C4_USB.1 C5_USB.1 CHG_LED.A D1.5 D2.2 MCP73831.4 PFMF.050.1.2 Q1.1 R1_PWRUSB.2 TP14.TP
VRTC [POWER]: C8.1 C10_SUPERCAP.2 R_CAPACITOR.1 U3.14
VUSB [POWER]: J2.A4 J2.A9 J2.B4 J2.B9 PFMF.050.1.1

## Tracks (layer width: path | path; a pad name or v marks a point on that pad's centre or on a via)
3V3  (via drill 0.3)
  Top 0.3: 66.89,106.85 53.6,106.85 | 53.6,106.85 53.39,106.85 47.09,100.55 46.4,100.55 IC1.2 | 66.89,106.85 67.93,107.89 R_BOOT.2 | v53.6,108.03 R_CHANGE.2 | v53.6,106.78 53.6,106.85 | J4.P4 5.68,89.89 5.4,89.89 1.39,93.9 1.39,102.91 6.44,107.96 10.6,107.96 TP16.TP 10.66,107.82 v10.66,106.64 | v10.66,104.43 10.66,103.6 C9.1 10.39,103.46 13.64,103.46 13.85,103.67 R6.2 13.99,103.74 23.06,103.74 27.35,108.03 27.7,108.03 R_RESET.2 27.84,107.96 28.12,107.68 v28.6,107.68 | 130.81,53.25 128.53,53.25 C1_BAT2.1 | 130.81,53.25 131.3,53.74 IC4.5 | J3.2 165.16,18.84 156.02,18.84 134.41,40.44 C3.+ 134.41,40.65 135.8,42.03 v135.8,42.24 | v130.88,47.16 130.88,53.12 130.81,53.25 | 94.94,54.22 90.92,50.21 88.02,50.21 R1_PINH1.2 87.88,50.07 79.29,41.48 64.4,41.48 60.25,37.33 59.42,37.33 R9.2 59.28,37.33 57.69,37.33 56.72,38.3 R7.2 56.51,38.36 54.22,38.36 54.08,38.5 R8.2 53.95,38.43 35.25,38.43 34.49,37.67 31.86,37.67 31.02,38.5 31.02,39.33 | 94.94,54.22 94.94,63.29 88.78,69.46 86.98,69.46 | 86.98,69.46 86.28,68.77 D7.2 86.15,68.7 86.15,66.76 86.49,66.41 R2-PINH1.2 86.56,66.27 86.56,62.53 U3.2 | R10.2 68.28,16 66.62,16 65.51,17.11 Q2.3 65.37,17.17 63.5,19.04 45.08,19.04 R_CL1.2 44.94,19.18 v44.94,26.04 | U1.7 40.23,53.05 40.23,54.15 U1.8 40.16,54.29 39.61,54.85 34.49,54.85 34.28,54.64 34.28,53.18 32.83,51.73 32.41,51.73 U1.3 32.34,51.59 v32.34,51.04 | 31.02,39.33 33.59,39.33 R5.2 | 31.02,39.33 29.15,39.33 28.05,40.44 R1.2 27.91,40.37 27.77,40.23 v27.29,40.23 | v9.7,40.23 8.93,41 8.93,41.41 U2.2 | v102,47.23 95.08,54.15 94.94,54.22 | 66.89,106.85 66.97,106.71 66.97,89.54 86.91,69.6 86.98,69.46
  Bottom 0.3: v53.6,106.78 53.6,107.68 | 53.6,107.68 v53.6,108.03 | v10.66,106.64 v10.66,104.43 | v28.6,107.68 53.6,107.68 | v135.8,42.24 v130.88,47.16 130.74,47.23 v102,47.23 | v9.7,40.23 v27.29,40.23 27.21,40.37 28.29,41.45 | v32.34,51.04 32.34,45.5 28.29,41.45 | v44.94,26.04 32.62,38.36 32.62,38.43 31.09,39.96 29.78,39.96 28.29,41.45
12C_PW  (via drill 0.3)
  Top 0.15: SENSOR2.6 157.41,9.97 157.61,9.97 158.58,9 158.58,4.92 157.47,3.81 C1.1 157.41,3.74 156.44,3.74 C2.1 156.37,3.81 156.37,3.95 155.33,4.99 R1_PINH.2 155.26,5.05 154.29,5.05 R2-PINH.2 154.29,5.12 153.67,5.75 153.67,7.89 | 153.67,8.66 154.15,9.14 154.43,9.14 SENSOR2.2 | 153.67,7.89 153.67,8.66 | 153.67,7.89 155.54,7.89 156.02,8.38 157.34,8.38 SENSOR2.8 | v24.17,57.34 22.85,58.66 22.85,58.93 U2.16 | v118.35,17.52 144.73,17.52 153.6,8.66 153.67,8.66
  Bottom 0.15: v24.17,57.34 78.53,57.34 v118.35,17.52
32KHZ
  Top 0.15: R2-PINH1.1 87.81,66.34 87.81,62.53 U3.1 87.81,62.46 87.81,62.12 86.56,60.87 85.04,60.87 74.17,50 42.52,50 39.68,47.16 39.68,46.88 39.75,46.81 39.75,45.57 34.21,40.03 31.72,40.03 30.4,41.34 27.77,41.34 23.96,37.53 20.22,37.53 17.8,39.96 17.8,41.41 U2.9
DN
  Top 0.15: J2.A7 164.19,54.5 164.75,54.5 164.95,54.29 164.95,53.81 164.75,53.6 164.19,53.6 J2.B7 164.12,53.53 163.08,53.53 162.46,52.91 158.58,52.91 156.92,51.24 154.98,51.24 D1.4
DP
  Top 0.15: 163.36,54.29 163.57,54.08 164.12,54.08 J2.A6 | 163.36,54.29 163.36,54.78 163.57,54.98 164.12,54.98 J2.B6 | D1.6 154.98,53.18 162.18,53.18 163.29,54.29 163.36,54.29
EPD_3V3  (via drill 0.3)
  Top 0.3: v66.34,13.92 66.34,15.03 Q2.2 | v67.52,12.74 68.83,11.43 TP17.TP | J1.16 81.3,14.89 81.72,14.89 J1.15 81.72,15.03 v81.72,21.54 | v82.2,24.52 83.1,23.61 83.52,23.61 EPD_C5.2 | v80.12,26.59 80.12,27.42 C7.1 80.19,27.56 80.33,27.7 80.33,30.61 L1.2
  Bottom 0.3: v66.34,13.92 v67.52,12.74 67.66,12.81 76.11,12.81 81.65,18.35 81.65,21.4 v81.72,21.54 81.72,23.96 82.13,24.38 v82.2,24.52 v80.12,26.59
EPD_3V3_C
  Top 0.3: TP13.TP 23.75,63.71 20.36,60.32 20.36,59 U2.18 20.22,58.86 20.22,58.52 12.4,50.69 11.08,50.69 9.28,48.89 9.28,45.36 6.86,42.94 6.86,39.89 28.88,17.87 44.94,17.87 R_CL1.1 45.08,17.73 47.71,15.1 64.4,15.1 Q2.1
EPD_BUSY  (via drill 0.3)
  Top 0.15: v84.69,21.88 84.69,14.89 J1.9 | U2.26 10.18,59 10.18,59.21 10.87,59.9 v10.87,60.11 10.87,60.18 9.42,61.63 9.42,67.66 TP9.TP
  Bottom 0.15: v84.69,21.88 84.69,26.87 54.71,56.85 21.4,56.85 18.14,60.11 v10.87,60.11
EPD_CS  (via drill 0.3)
  Top 0.15: v20.36,38.02 20.36,41.41 U2.11 | v20.36,34 20.36,33.52 21.05,32.83 TP10.TP | v83.24,21.54 83.24,14.89 J1.12 | v60.04,37.88 59.35,38.57 R9.1 | D6.2 59.28,42.17 59.28,41.97 59.97,41.27 59.97,39.27 59.35,38.64 R9.1 | v32.06,38.23 34.49,38.23 35.39,39.13 58.79,39.13 59.28,38.64 R9.1
  Bottom 0.15: v20.36,34 v20.36,38.02 23.2,38.02 24.17,38.99 27.56,38.99 28.32,38.23 v32.06,38.23 | v83.24,21.54 83.24,24.52 69.87,37.88 v60.04,37.88
EPD_DC  (via drill 0.3)
  Top 0.15: v83.79,21.26 83.79,14.89 J1.11 83.72,14.82 83.72,14.47 80.68,11.43 75.28,11.43 70.01,16.69 69.46,16.69 51.31,34.83 15.17,34.83 12.74,37.26 12.74,41.41 U2.5 | v83.79,27.15 83.79,27.35 84.62,28.18 TP11.TP
  Bottom 0.15: v83.79,27.15 v83.79,21.26
EPD_RST
  Top 0.15: J1.10 84.21,14.82 84.21,14.47 80.88,11.15 70.91,11.15 68.63,13.43 32.76,13.43 6.44,39.75 6.44,46.4 8.86,48.82 8.86,51.11 16.48,58.72 16.48,58.93 U2.21 16.55,59 16.55,59.28 19.94,62.67 19.94,64.54 TP12.TP
FLASH_CS
  Top 0.15: 37.36,44.49 38.99,46.12 D9.2 | 37.36,44.49 33.66,40.79 33.66,40.65 R5.1 33.59,40.79 31.37,40.79 29.71,42.45 22.3,42.45 21.61,41.76 21.61,41.48 U2.12 | 37.36,44.49 31.02,50.83 31.02,53.12 32.13,54.22 32.34,54.22 U1.1
GDR
  Top 0.15: J1.2 88.29,14.89 88.29,17.24 93.42,22.37 Q3.1 93.49,22.37 97.44,18.42 99.17,18.42 R4.2
GND  (via drill 0.3)
  Top 0.3: BOOT_BUTTON.2 BOOT_BUTTON.1 62.19,108.03 62.05,107.89 59.28,107.89 C6.2 59.14,107.75 54.08,107.75 53.67,107.34 51.66,107.34 50.9,108.1 CHANGE_BUTTON.2 50.69,108.1 47.37,108.1 CHANGE_BUTTON.1 47.23,108.1 44.87,108.1 C10.2 | C_DELAY.2 47.02,97.71 47.02,98.89 46.4,99.51 IC1.3 46.19,99.58 46.05,99.58 45.15,100.48 45.15,107.96 C10.2 | J4.G1 16.34,84.76 16.34,85.66 17.24,86.56 17.24,89.47 16.34,90.37 J4.G2 16.2,90.51 16.2,91.48 15.37,92.31 15.37,99.31 | 9.56,102.14 5.75,102.14 5.58,102.32 | 9.56,102.14 10.32,102.14 C9.2 10.46,102.08 13.23,99.31 15.37,99.31 | 5.58,102.32 4.16,103.74 TP5.TP | 15.37,99.31 16.2,99.31 D10.1 | 5.58,102.32 2.77,99.51 TP4.TP 2.84,99.37 3.05,99.17 3.05,95.01 J4.G4 3.12,94.87 3.12,94.39 5.47,92.03 5.68,92.03 J4.P6 5.82,91.96 6.37,91.96 7.41,90.92 7.41,86.49 2.7,81.78 2.22,81.78 J4.G3 2.08,81.72 2.08,75.55 7.55,70.08 7.55,59 U2.28 7.69,58.86 v7.69,53.74 | 9.56,102.14 9.56,104.08 14.61,109.14 20.08,109.14 C5.2 20.22,109.21 20.98,109.21 22.09,108.1 22.23,108.1 RESET_BUTTON.1 22.37,108.1 25.69,108.1 RESET_BUTTON.2 25.9,108.1 26.38,108.58 v26.87,108.58 | v43.84,108.24 44.74,108.24 C10.2 | 136.7,44.11 134.97,44.11 134.41,43.56 C3.- 134.28,43.49 132.54,41.76 129.77,41.76 128.25,43.28 127.91,43.28 MCP73831.2 | 136.7,44.11 138.43,44.11 C2_BAT.2 | U4.9 142.24,58.31 142.24,58.1 141.69,57.55 141.34,57.55 U4.4 141.27,57.41 141.27,44.46 137.95,41.13 137.05,41.13 136.7,41.48 136.7,44.11 | U4.9 142.31,58.45 141.69,59.07 141.34,59.07 U4.1 141.2,59.07 140.92,59.07 138.64,56.78 138.64,55.68 137.95,54.98 R1_PWRUSB.1 137.81,54.85 137.74,54.78 134.14,54.78 IC4.2
  Top 0.3: U4.9 142.38,58.1 143.28,58.1 U4.6 143.42,58.03 143.76,58.03 145.77,56.02 152.63,56.02 C5_USB.2 152.77,55.88 152.77,54.08 153.32,53.53 153.32,52.7 152.84,52.22 152.49,52.22 D1.2 152.9,52.08 153.53,51.45 153.53,42.52 154.08,41.97 166.2,41.97 | C2.2 156.44,5.05 157.41,5.05 C1.2 157.54,5.19 157.54,7.41 158.17,8.03 158.17,8.73 157.82,9.07 157.47,9.07 SENSOR2.7 157.34,9.14 156.5,9.14 | 156.5,9.14 156.23,9.14 155.54,8.45 154.5,8.45 SENSOR2.1 | 156.5,9.14 156.5,10.32 156.92,10.73 157.34,10.73 SENSOR2.5 157.47,10.87 164.4,17.8 165.16,17.8 J3.1 165.3,17.87 165.65,17.87 166.2,18.42 166.2,41.97 | J2.B12 164.19,51.24 164.19,50.97 J2.A1 164.26,50.83 164.26,49.65 164.68,49.24 J2.MP3 164.88,49.17 166.2,49.17 | 166.2,49.17 166.75,49.17 | 166.75,49.17 168.62,49.17 J2.MP1 | J2.B1 164.19,57.41 164.19,57.62 J2.A12 164.26,57.76 164.26,58.93 164.68,59.35 J2.MP4 | 166.75,59.42 164.88,59.42 J2.MP4 | 166.75,59.42 168.62,59.42 J2.MP2 | 166.75,59.42 166.75,49.17 | 126.24,53.25 125.14,53.25 123.2,55.19 C1_BAT1.2 123.27,55.33 131.09,63.16 138.5,63.16 C4_USB.2 138.64,63.23 155.81,63.23 156.57,62.46 R2-USB1.1 156.71,62.33 158.24,62.33 158.31,62.26 R2-USB.2 158.44,62.12 161.56,59 164.12,59 J2.MP4 | 126.24,53.25 127.14,53.25 C1_BAT2.2 | 126.31,46.88 123.61,44.18 122.78,44.18 C1_BAT.2 122.64,44.11 119.59,44.11 101.73,26.25 101.73,19.39 101.52,19.18 100.34,19.18 100.14,18.97 100,18.91 | 126.31,46.88 128.39,46.88 R2_BAT.1 | 126.24,53.25 126.24,47.02 126.31,46.88 | 166.2,49.17 166.2,41.97 | 100,18.91 99.23,19.67 R4.1 | 100,18.91 100,17.45 96.26,13.71 SJ1.1 96.05,13.64 95.5,13.09 93.21,13.09 R2.1 93,13.02 92.38,12.4 89.82,12.4 J1.MP1 89.61,12.4 87.25,12.4 85.32,14.34 85.32,14.82 J1.8 85.32,14.96 85.32,22.44
  Top 0.3: 68.97,21.47 68.97,22.02 68.42,22.58 D8.1 | 68.97,21.47 68.97,20.01 EPD_C12.1 | v78.39,21.61 77.97,22.02 77.97,22.3 EPD_C8.1 | v79.36,21.47 79.36,21.95 79.64,22.23 EPD_C7.1 | EPD_C11.1 70.64,19.88 72.09,19.88 74.37,22.16 EPD_C10.1 | EPD_C10.1 74.51,22.16 76.31,22.16 EPD_C9.1 76.45,22.09 v77.08,21.47 | C7.2 78.74,27.42 77.08,27.42 73.68,24.03 73.68,22.92 74.31,22.3 EPD_C10.1 | v72.09,21.47 68.97,21.47 | J1.MP2 76.31,12.4 78.74,12.4 80.75,14.4 80.75,14.82 J1.17 80.81,14.96 80.81,18.21 | 85.32,22.44 83.65,22.44 EPD_C5.1 83.52,22.37 81.23,22.37 EPD_C6.1 81.3,22.23 80.81,21.74 80.81,18.21 | 85.32,22.44 85.45,22.44 | 85.45,22.44 86.22,22.44 EPD_C2.1 | 89.12,23.89 89.12,22.99 88.36,22.23 EPD_C1.1 | 89.12,23.89 88.57,24.45 85.66,24.45 85.45,24.24 85.45,22.44 | D3.1 94.87,27.42 93.21,27.42 89.75,23.96 89.26,23.96 89.12,23.89 | v80.75,18.21 80.81,18.21 | U2.29_1 12.12,47.51 12.12,48.68 U2.29_2 | U2.29_1 12.26,47.51 13.3,47.51 U2.29_4 13.43,47.51 14.54,47.51 U2.29_7 14.61,47.64 14.61,48.68 U2.29_8 | U2.29_5 13.3,48.75 12.26,48.75 U2.29_2 | U2.29_3 12.12,49.93 12.12,48.82 U2.29_2 | U2.29_3 12.26,50 13.3,50 U2.29_6 13.43,50 14.54,50 U2.29_9 14.68,50.07 19.39,54.78 32.96,54.78 33.17,54.57 33.17,52.7 32.96,52.49 32.06,52.49 31.65,52.08 31.65,50.97 32.13,50.48 32.27,50.48 U1.4 32.41,50.48 34.42,50.48 U1.9 35.66,51.52 v39.54,47.64 | U2.1 7.62,41.48 7.62,43.07 11.98,47.44 U2.29_1 | C8.2 90.72,56.65 92.73,56.65 93.42,57.34 C10_SUPERCAP.1 93.35,57.06 94.46,55.95 94.46,54.36 91.96,51.87 84.9,51.87 84.07,52.7 84.07,53.18 U3.13 83.93,52.63 74.86,43.56 56.37,43.56 54.98,42.17 v54.91,42.03 54.57,42.38 54.15,42.38 D12.1 54.02,42.52 50.41,46.12 D9.1 40.44,46.26 40.16,46.54 v40.16,47.02
  Top 0.3: D6.1 59.21,40.72 56.37,40.72 D11.1 56.23,40.79 55.61,40.79 v55.47,40.93 | v11.29,50.14 11.91,50.14 11.98,50.07 U2.29_3
  Bottom 0.3: v43.84,108.24 27.21,108.24 v26.87,108.58 | v79.36,21.47 79.22,21.61 v78.39,21.61 78.25,21.54 77.7,21.54 | 77.7,21.54 77.14,21.54 v77.08,21.47 v72.09,21.47 72.02,21.61 72.02,23.96 55.54,40.44 55.54,40.79 v55.47,40.93 55.47,41.48 v54.91,42.03 | 77.7,21.54 77.7,18.56 78.05,18.21 v80.75,18.21 | v40.16,47.02 v39.54,47.64 | v11.29,50.14 v7.69,53.74
  pour Top: 6.26,41.06 6.24,41.04 6.22,41.02 -25.02,41.02 -25.02,-22.82 226.52,-22.82 226.52,175.92 -24.92,175.92 -24.92,174.1 -24.92,174.09 -24.92,174.09 -24.92,174.08 -24.93,174.07 -25.12,173.59 -25.12,59.48 6.22,59.48 6.24,59.46 6.26,59.44 6.28,59.42 6.28,41.08
  pour Bottom: 6.16,41.06 6.14,41.04 6.12,41.02 -25.02,41.02 -25.02,-23.12 226.72,-23.12 226.72,175.92 -25.42,175.92 -25.42,59.48 6.12,59.48 6.14,59.46 6.16,59.44 6.18,59.42 6.18,41.08
INT_RTC  (via drill 0.3)
  Top 0.15: v85.94,61.35 85.94,61.84 85.32,62.46 U3.3 | R1_PINH1.1 86.7,50.21 v85.94,50.97 82.82,50.97 74.79,42.94 58.38,42.94 56.85,41.41 54.91,41.41 54.64,41.69 37.12,41.69 34.14,38.71 v31.58,38.71 | v16.55,35.8 16.55,41.41 U2.8 | v16.55,23.48 18.56,21.47 TP15.TP
  Bottom 0.15: v85.94,61.35 v85.94,50.97 | v16.55,23.48 v16.55,35.8 16.62,35.8 20.08,39.27 27.7,39.27 28.25,38.71 v31.58,38.71
IO/BOOT  (via drill 0.3)
  Top 0.15: R_BOOT.1 67.93,109.21 66.97,109.21 66.55,108.79 63.09,108.79 62.33,109.55 BOOT_BUTTON.4 62.19,109.48 61.91,109.21 59.28,109.21 C6.1 59.21,109.14 v58.38,108.31 | v24.17,62.39 24.17,59 U2.15
  Bottom 0.15: v24.17,62.39 24.17,74.1 v58.38,108.31
IO/CHANGE
  Top 0.15: R_CHANGE.1 52.7,109.28 52.01,109.28 51.59,108.86 47.99,108.86 47.3,109.55 CHANGE_BUTTON.4 47.23,109.55 47.16,109.48 44.87,109.48 C10.1 44.8,109.42 44.39,109.42 43.35,108.38 43.35,101.73 13.99,72.37 13.99,59 U2.23
MISO  (via drill 0.3)
  Top 0.15: v53.39,37.88 54.02,37.26 R8.1 | v53.39,40.16 53.39,40.3 54.02,40.93 D12.2 | v31.51,52.98 32.34,52.98 U1.2 | J4.P7 5.96,93.07 6.09,93.07 7.83,91.34 7.83,80.4 3.46,76.04 TP6.TP 3.46,75.97 7.96,71.47 7.96,67.38 8.86,66.48 8.86,59 U2.27 8.93,58.93 8.93,58.66 v9.76,57.82
  Bottom 0.15: v53.39,37.88 v53.39,40.16 53.32,40.16 41.97,51.52 39.4,51.52 37.95,52.98 v31.51,52.98 14.61,52.98 v9.76,57.82
MOSI  (via drill 0.3)
  Top 0.15: v15.23,35.8 15.23,41.41 U2.7 | v15.23,34.35 15.23,33.31 15.51,33.03 TP7.TP | v5.19,88.02 5.89,88.71 J4.P3 | v82.27,21.81 82.27,14.89 J1.14 | v60.11,36.63 56.92,36.63 56.58,36.98 R7.1 | v47.09,50.48 40.23,50.48 U1.5 | v56.58,43 56.37,42.8 56.37,42.17 D11.2
  Bottom 0.15: v15.23,34.35 v15.23,35.8 13.5,35.8 6.44,42.87 6.44,58.31 | v5.19,88.02 5.19,60.66 6.44,59.42 6.44,58.31 | v82.27,21.81 82.27,23.96 82.68,24.38 82.68,24.65 70.7,36.63 v60.11,36.63 60.11,36.7 59.55,37.26 59.55,38.02 55.57,42 | 55.57,42 v47.09,50.48 47.02,50.48 45.7,51.8 39.54,51.8 37.88,53.46 23.96,53.46 19.11,58.31 6.44,58.31 | 55.57,42 v56.58,43
N$1  (via drill 0.3)
  Top 0.15: v156.71,59.55 156.71,61.01 R2-USB1.2 | v163.22,53.05 164.12,53.05 J2.A5
  Bottom 0.15: v163.22,53.05 v156.71,59.55
N$2
  Top 0.15: R2-USB.1 158.38,60.87 158.79,60.87 163.57,56.09 164.12,56.09 J2.B5
N$3
  Top 0.15: C1_BAT1.1 124.44,55.26 126.31,55.26 126.59,55.54 D2.1 126.66,55.54 127.63,55.54 128.25,54.91 133.44,54.91 | 133.44,54.91 133.44,55.12 133.93,55.61 134.07,55.61 IC4.3 | 133.44,54.91 133.44,54.29 133.93,53.81 134.07,53.81 IC4.1 134.21,53.74 135.25,53.74 139.4,49.58 139.75,49.58 Q1.2
N$4
  Top 0.15: 84.62,38.78 83.17,38.78 81.23,40.72 D4.1 | 84.62,38.78 C4.1 | 84.62,38.78 84.62,37.05 91.34,30.33 91.34,27.49 D3.2
N$7
  Top 0.15: C_DELAY.1 48.41,97.71 48.41,100.69 49.1,101.38 IC1.5
N$8
  Top 0.15: CHG_LED.C 124.93,44.25 124.93,43.9 124.3,43.28 124.3,41.13 125.14,40.3 R1_BAT.1
N$9
  Top 0.15: R1_BAT.2 126.52,40.3 126.52,43.21 127.56,44.25 MCP73831.1
N$10
  Top 0.15: R2_BAT.2 129.71,46.88 129.71,45.01 130.4,44.32 MCP73831.5
N$11
  Top 0.15: J1.24 77.21,14.89 72.78,14.89 69.04,18.63 EPD_C12.2
N$13  (via drill 0.3)
  Top 0.15: v78.25,18.77 78.25,14.89 J1.22 | v75.28,23.75 74.65,23.75 74.44,23.55 EPD_C10.2
  Bottom 0.15: v78.25,18.77 80.12,20.64 80.12,22.58 78.94,23.75 v75.28,23.75
N$15
  Top 0.15: J1.19 79.71,14.89 79.71,20.5 78.88,21.33 78.88,22.71 79.64,23.48 EPD_C7.2
N$16  (via drill 0.3)
  Top 0.15: v79.22,20.36 79.22,14.89 J1.20 | v78.81,23.27 78.32,23.27 77.97,23.61 EPD_C8.2
  Bottom 0.15: v79.22,20.36 79.22,20.71 79.84,21.33 79.84,22.23 v78.81,23.27
N$17
  Top 0.15: D7.1 88.22,68.7 88.22,67.38 91,64.61 R_CAPACITOR.2
N$18
  Top 0.15: J1.18 80.26,14.89 80.26,21.74 80.54,22.02 80.54,23.06 81.16,23.68 EPD_C6.2
N$19  (via drill 0.3)
  Top 0.15: v30.05,40.86 29.71,40.51 29.36,40.51 R1.1 | v30.19,42.59 29.98,42.59 29.85,42.73 20.08,42.73 19.04,41.69 19.04,41.48 U2.10
  Bottom 0.15: v30.05,40.86 30.05,42.45 v30.19,42.59
N$20
  Top 0.15: J1.5 86.77,14.89 86.77,21.88 86.91,22.02 86.91,23.13 86.28,23.75 EPD_C2.2
N$22
  Top 0.15: J1.4 87.25,14.89 87.25,22.44 88.29,23.48 EPD_C1.2
PREVGH
  Top 0.15: J1.21 78.74,14.89 78.74,20.43 77.01,22.16 77.01,22.78 76.38,23.41 EPD_C9.2 76.52,23.34 78.18,25 90.23,25 93.63,28.39 93.63,34.07 D5.1
PREVGL
  Top 0.15: J1.23 77.7,14.89 77.7,15.3 74.51,18.49 70.64,18.49 EPD_C11.2 70.57,18.56 69.87,19.25 69.87,20.22 70.08,20.43 71.67,20.43 72.57,21.33 72.57,30.89 77.7,36.01 77.7,40.72 D4.2
RESE
  Top 0.15: J1.3 87.81,14.89 87.81,18.07 93.42,23.68 Q3.2 93.49,23.68 96.33,23.68 100.14,19.88 100.97,19.88 R3.2
RESE'
  Top 0.15: R2.2 93.07,11.77 95.84,11.77 96.19,12.12 SJ1.2 96.26,12.19 96.4,12.19 100.97,16.76 100.97,18.49 R3.1
RESET  (via drill 0.3)
  Top 0.15: v21.05,108.38 20.64,107.96 C5.1 | v21.19,109.76 22.09,109.76 22.23,109.62 RESET_BUTTON.4 | v26.87,109.35 27.7,109.35 R_RESET.1 | v45.7,102.08 IC1.1 | v10.18,44.87 10.18,41.48 U2.3 | v21.05,57.82 v15.72,52.49
  Bottom 0.15: 21.05,109.35 21.05,109.62 v21.19,109.76 | 21.05,109.35 v21.05,108.38 | 21.05,109.35 26.38,109.35 | 26.38,109.35 v26.87,109.35 | 32.76,102.08 v45.7,102.08 | 32.76,102.08 26.38,108.44 26.38,109.35 | v10.18,44.87 10.18,46.95 v15.72,52.49 | v21.05,57.82 21.05,58.03 19.18,59.9 19.18,88.43 32.76,102 32.76,102.08
RTC_RST
  Top 0.15: U2.17 21.61,58.93 21.61,58.66 23.41,56.85 78.74,56.85 84,62.12 84,62.46 U3.4
RX
  Top 0.15: U2.24 12.74,59 12.74,72.71 12.88,72.85 TP2.TP
SCK  (via drill 0.3)
  Top 0.15: R6.1 13.92,102.35 14.68,102.35 16.2,100.83 D10.2 | v6.86,90.23 6.16,90.92 5.96,90.92 J4.P5 | v15.44,100 16.2,100.76 D10.2 | TP8.TP 26.25,92.8 24.24,92.8 16.27,100.76 D10.2 | 40.65,35.32 15.1,35.32 13.99,36.42 13.99,41.41 U2.6 | 40.65,35.32 51.24,35.32 68.49,18.07 69.04,18.07 75.41,11.7 79.98,11.7 82.68,14.4 82.68,14.82 J1.13 | v40.23,51.04 40.23,51.66 U1.6 40.16,51.8 v39.61,52.35 | v40.65,35.39 40.65,35.32
  Bottom 0.15: v15.44,100 6.86,91.41 v6.86,90.23 6.86,63.5 11.77,58.59 19.25,58.59 24.1,53.74 38.23,53.74 v39.61,52.35 | v40.23,51.04 40.23,47.58 40.65,47.16 v40.65,35.39
SCL  (via drill 0.3)
  Top 0.15: v153.53,4.43 153.6,4.43 154.22,3.81 R2-PINH.1 | v153.53,10.11 154.15,10.73 154.43,10.73 SENSOR2.4 | v144.53,58.03 144.04,58.52 143.35,58.52 U4.7 | v144.53,43.28 144.53,41.48 164.68,21.33 | 164.68,21.33 165.16,20.84 J3.4 | 164.68,21.33 v164.12,20.77 | v20.43,61.84 17.8,59.21 17.8,59 U2.20 | v87.19,54.36 87.19,53.88 87.81,53.25 U3.16
  Bottom 0.15: v153.53,4.43 v153.53,10.11 153.53,10.18 v164.12,20.77 | v144.53,43.28 v144.53,58.03 144.53,59.14 144.18,59.49 87.19,59.49 | v20.43,61.84 86.08,61.84 87.19,60.73 87.19,59.49 | v87.19,54.36 87.19,59.49
SDA  (via drill 0.3)
  Top 0.15: v19.67,60.04 19.04,59.42 19.04,59 U2.19 | v86.49,54.64 86.49,53.32 86.56,53.25 U3.15 | v155.33,2.98 155.33,3.74 R1_PINH.1 | v155.33,9.35 154.7,9.97 154.5,9.97 SENSOR2.3 | v144.04,59 143.35,59 U4.8 | v144.04,42.8 144.04,40.23 164.47,19.8 | 164.47,19.8 165.16,19.8 J3.3 | v164.12,19.39 164.47,19.74 164.47,19.8
  Bottom 0.15: v19.67,60.04 76.24,60.04 85.8,50.48 86.08,50.48 86.49,50.9 | v86.49,54.64 86.49,50.9 | v155.33,2.98 v155.33,9.35 155.33,10.6 v164.12,19.39 | v144.04,42.8 144.04,50.9 | 144.04,50.9 v144.04,59 | 144.04,50.9 86.49,50.9
SRC
  Top 0.15: 86.01,37.53 93.56,37.53 93.63,37.6 D5.2 93.56,37.46 95.7,35.32 95.7,26.94 95.56,26.8 95.5,26.8 91.76,23.06 91.41,23.06 Q3.3 | 86.01,37.53 85.32,37.53 C4.2 | 86.01,37.53 86.01,39.2 83.79,41.41 80.61,41.41 80.4,41.2 80.4,35.25 L1.1
SS_SD  (via drill 0.3)
  Top 0.15: v67.66,17.87 67.73,17.87 69.6,16 R10.1 | v67.66,21.81 66.89,22.58 D8.2 | 12.08,42.35 12.81,43.07 v32.34,43.07 | 12.08,42.35 11.43,41.69 11.43,41.48 U2.4 | v6.92,47.51 6.92,58.93 0.9,64.96 0.9,82.96 5.54,87.6 6.3,87.6 J4.P2 | 12.08,42.35 v11.84,42.59
  Bottom 0.15: v67.66,17.87 v67.66,21.81 53.6,21.81 v32.34,43.07 | v11.84,42.59 v6.92,47.51
TX
  Top 0.15: U2.25 11.36,59 11.36,74.31 10.8,74.86 TP1.TP
USB_D+  (via drill 0.3)
  Top 0.15: v137.32,38.3 152.14,53.12 D1.1 | v29.43,41.83 24.52,41.83 24.17,41.48 U2.14
  Bottom 0.15: v137.32,38.3 137.32,35.87 113.71,12.26 59.35,12.26 31.23,40.37 29.92,40.37 29.43,40.86 v29.43,41.83
USB_D-  (via drill 0.3)
  Top 0.15: v152.42,50.55 152.42,51.18 D1.3 | v24.31,38.5 24.31,39.75 22.85,41.2 22.85,41.41 U2.13
  Bottom 0.15: v152.42,50.55 113.85,11.98 50.83,11.98 v24.31,38.5
VBAT  (via drill 0.3)
  Top 0.3: 127.91,41.69 127.91,37.95 129.84,36.01 TP3.TP | 127.91,41.69 127.91,42.31 MCP73831.3 | U4.2 141.34,58.52 141.34,58.1 U4.3 141.2,58.03 140.92,58.03 139.12,56.23 139.12,51.87 138.92,51.66 Q1.3 139.05,51.59 140.51,50.14 140.51,44.94 138.5,42.94 C2_BAT.1 138.36,42.8 v137.25,41.69 | v129.08,41.69 127.91,41.69
  Bottom 0.3: v137.25,41.69 v129.08,41.69
VBUS  (via drill 0.3)
  Top 0.3: TP14.TP 118.69,41.34 120.15,42.8 122.71,42.8 C1_BAT.1 122.78,42.66 122.78,41.41 124.72,39.47 125.62,39.47 125.83,39.68 125.83,42.1 125.2,42.73 CHG_LED.A 125,42.87 125.14,42.87 127.14,44.87 128.53,44.87 130.4,43 | 130.4,43 130.4,42.38 MCP73831.4 | 136.98,49.51 137.88,49.51 Q1.1 | 136.98,49.51 130.54,43.07 130.4,43 | 136.91,56.3 137.74,56.3 137.81,56.23 R1_PWRUSB.2 137.67,56.44 138.57,57.34 138.57,59.55 | 136.91,56.3 130.81,56.3 130.12,55.61 128.81,55.61 D2.2 | 138.57,59.55 138.57,61.91 C4_USB.1 | PFMF.050.1.2 154.84,44.11 154.01,44.94 154.01,51.66 154.43,52.08 D1.5 154.91,52.22 154.5,52.22 154.01,52.7 154.01,55.88 C5_USB.1 153.94,56.02 150.41,59.55 138.57,59.55 | v136.91,51.45 136.91,49.65 136.98,49.51 | v136.91,56.16 136.91,56.3
  Bottom 0.3: v136.91,56.16 v136.91,51.45
VRTC
  Top 0.3: C10_SUPERCAP.2 93.42,55.19 93.35,55.26 90.72,55.26 C8.1 90.58,55.4 89.89,56.09 | 89.89,56.09 89.89,57.06 91,58.17 91,63.29 R_CAPACITOR.1 | U3.14 85.32,53.25 85.32,54.22 87.12,56.02 89.75,56.02 89.89,56.09
VUSB  (via drill 0.3)
  Top 0.3: J2.A9 164.19,56.78 164.19,56.58 J2.B4 164.33,56.51 164.88,56.51 165.37,56.02 165.37,52.63 164.81,52.08 164.33,52.08 J2.B9 164.19,52.01 164.19,51.8 J2.A4 164.05,51.73 v158.03,51.73 | v151.52,45.22 150.41,44.11 PFMF.050.1.1
  Bottom 0.3: v151.52,45.22 v158.03,51.73